# Altium PCB blinds.PcbDoc
Units mil, origin at the board's own origin, x right, y up, seen from the top; angles counter-clockwise.
Board outline 945 x 945 mil, 2 copper layers (Top Layer, Bottom Layer); 16 components, 11 nets, 36 pads, 6 vias.
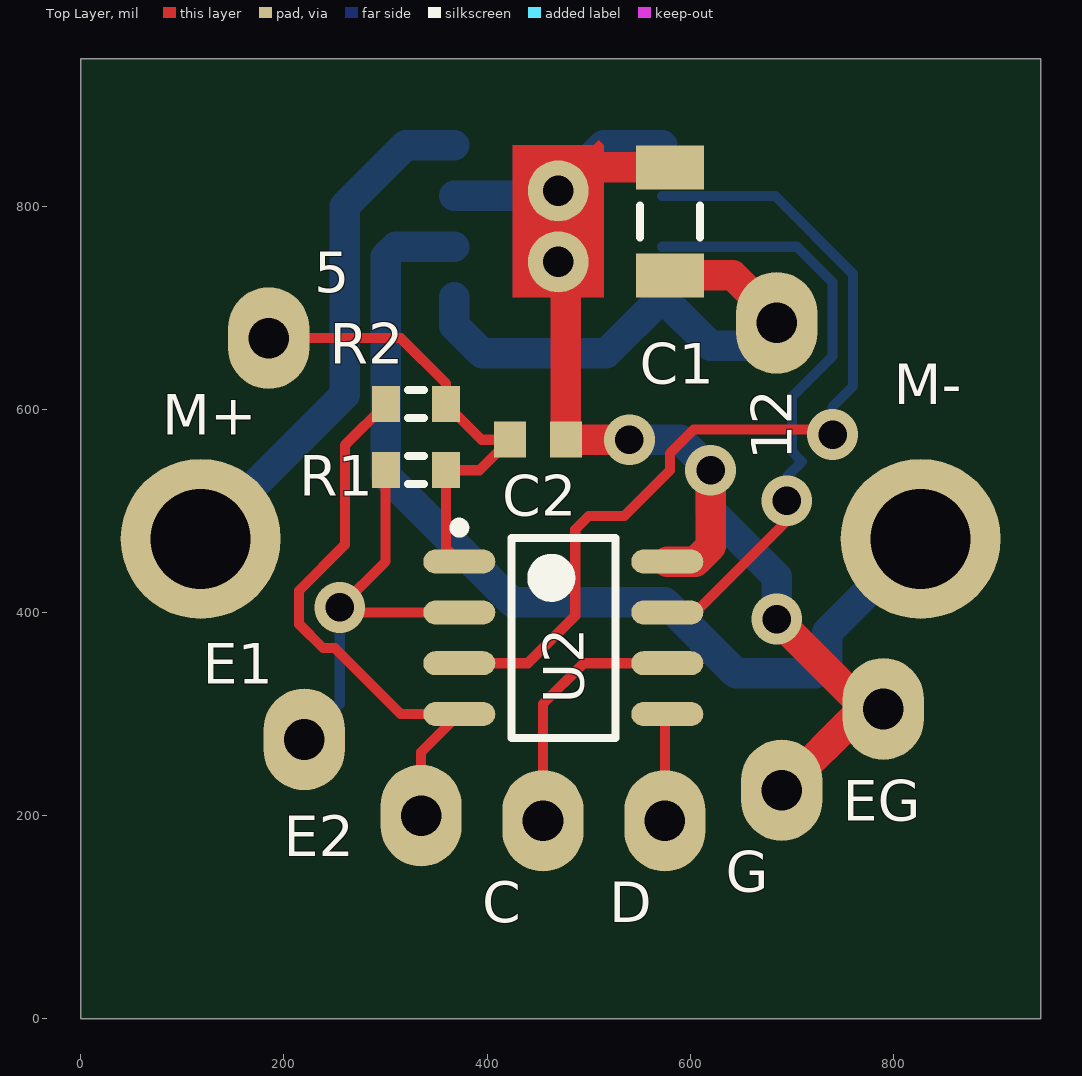
[diagram p0: Top Layer view]
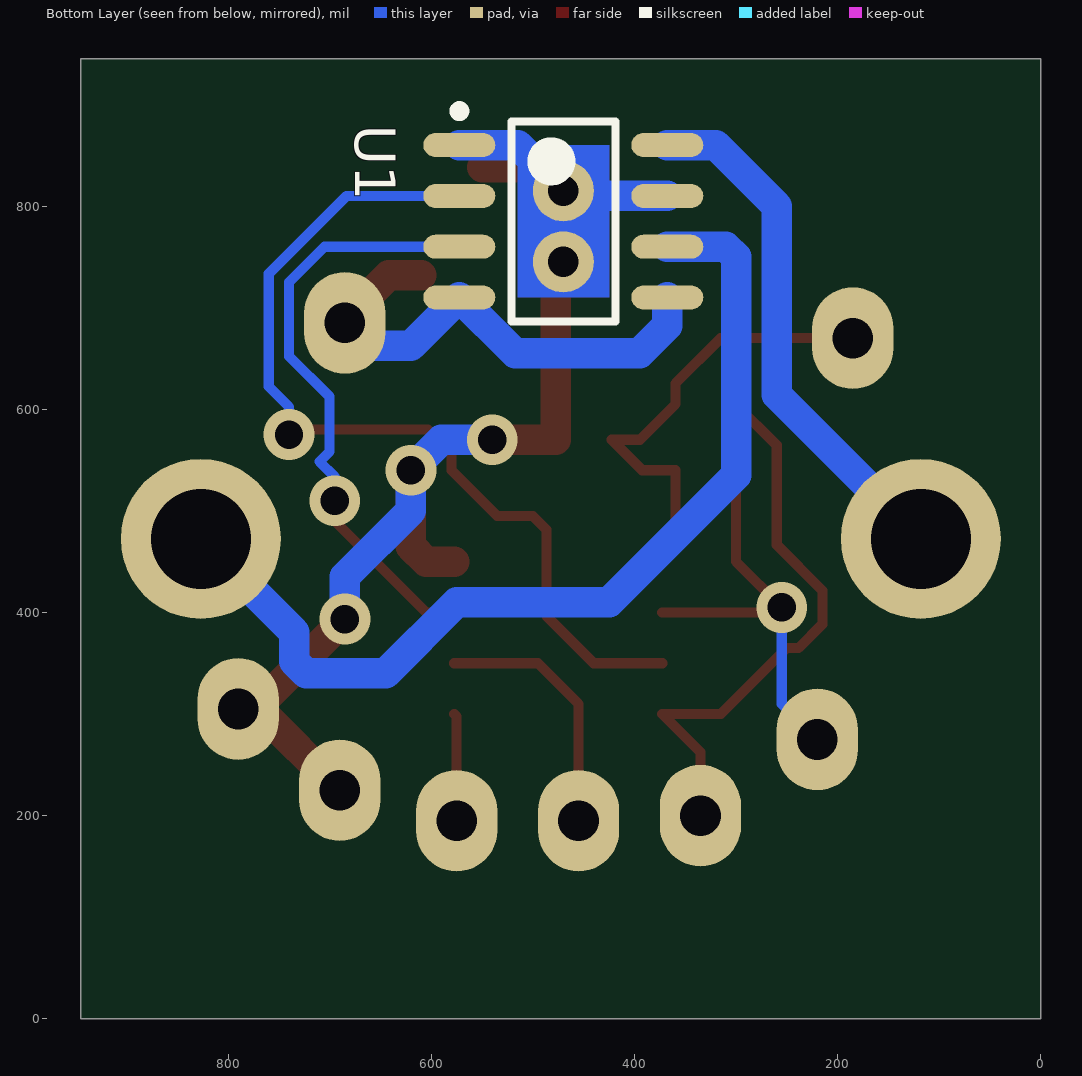
[diagram p1: Bottom Layer view, seen from below]

## Layer stack, top to bottom
Top Solder: solder mask 0.4, Solder Resist, Dk 3.5
Top Layer: signal copper 1.4
Dielectric 1: dielectric 12.6, FR-4, Dk 4.8
Bottom Layer: signal copper 1.4
Bottom Solder: solder mask 0.4, Solder Resist, Dk 3.5

## Board outline
0,0 0,945 945,945 945,0

## Design rules (kind name [scope] priority, off if disabled: settings)
Clearance [All] p1: gap=10
HoleSize [All] p1: absolutevalues=TRUE maxlimit=100 minlimit=20 maxpercent=80.000 minpercent=20.000
PolygonConnect [All] p1: connectstyle=Relief reliefconductorwidth=10 reliefentries=4 polygonreliefangle="90 Angle" airgapwidth=10
RoutingVias [All] p1: holewidth=28 width=50 viastyle="Through Hole" minholewidth=28 minwidth=50 maxholewidth=28 maxwidth=50
SMDNeckDown [InNetClass('HC')] p1: percent=200.000
SMDNeckDown SMDNeckDown_1 [All] p2: percent=150.000
SilkToSolderMaskClearance [IsPad And Not HasFootprint('J1-0603')] p1: minsilkscreentomaskgap=10 clearancetoexposedcopper=TRUE
SolderMaskExpansion [All] p1: expansion=4
Width Width_1 [InNetClass('HC')] p1: maxlimit=30 minlimit=30 preferedwidth=30
Width [All] p2: maxlimit=10 minlimit=10 preferedwidth=10
28 further rules are at their usual default settings.

## Classes and differential pairs
net class HC: GND NetM+_1 NetM-_1 V12

## Components (designator, comment, footprint, x,y, rotation, side; value= is the part's Value field where it differs from the comment)
5 "Socket" PIN1L#1 185,670 r180 top
12 "Socket" PIN1L#1 685,685 r0 top
C "Socket" PIN1L#1 455,195 r180 top
C1 "Cap Semi" C1206 580,785 r270 top
C2 "Cap Semi" 1608[0603] 450,570 r180 top
D "Socket" PIN1L#1 575,195 r0 top
E1 "Socket" PIN1L#1 220,275 r180 top
E2 "Socket" PIN1L#1 335,200 r0 top
EG "Socket" PIN1L#1 790,305 r0 top
G "Socket" PIN1L#1 690,225 r180 top
M+ "Socket" PIN1L#2 -85,455 r0 top
M- "Socket" PIN1L#3 795,430 r0 top
R1 "5k" J1-0603 330,540 r0 top
R2 "5k" J1-0603 330,605 r0 top
U1 "A4953" SOIC150-8_N 470,785 r180 bottom
U2 "PIC12F1840" SOIC150-8_N 475,375 r0 top

## Footprints (in the part's own frame and the unit in brackets; to place one, negate y for a bottom-side part, rotate by r counter-clockwise, add the part's x,y. Pads: shape width x height; smd on the part's side, far side on the other; paste and mask are expansions set on the pad)
1608[0603] [mm] "Chip Capacitor, Body 1.6x0.8mm, IPC High Density"
  rect 0.8x0.9 smd: 1(-0.7,0) 2(0.7,0)
  body extent -0.87,-0.48 0.87,0.48, height 1.3
C1206 [mm] "Chip Capacitor, Body 3.2x1.6mm, IPC High Density"
  rect 1.1x1.7 smd: 1(-1.35,0) 2(1.35,0)
  silkscreen extent -0.4,-0.75 0.4,0.75, body extent -1.7,-0.9 1.7,0.9, height 1.3
J1-0603 [mm] "Chip Resistor, Body 1.6x0.8mm, IPC High Density"
  rect 0.7x0.9 smd: 1(-0.75,0) 2(0.75,0)
  silkscreen extent -0.2,-0.35 0.2,0.35, body extent -0.85,-0.48 0.85,0.48, height 0.9
PIN1L#1 [mil] "Connector; Plug"
  oval 80x100 hole 40: 1(0,0)
PIN1L#2 [mil] "Connector; Plug"
  round 157.48 hole 98.43: 1(203.11,17.44)
PIN1L#3 [mil] "Connector; Plug"
  round 157.48 hole 98.43: 1(31.77,42.44)
SOIC150-8_N [mm]
  oval 1.8x0.6 smd: 1(-2.6,1.905) 2(-2.6,0.635) 3(-2.6,-0.635) 4(-2.6,-1.905) 5(2.6,-1.905) 6(2.6,-0.635) 7(2.6,0.635) 8(2.6,1.905)
  silkscreen extent -2.73,-2.5 1.3,2.88, body extent -2,-2.5 2,2.5, height 1.76

## Part data
C1 C2: "Capacitor (Semiconductor SIM Model)"
R1 R2: library part Res3, "Resistor"

## Free pads (board coordinates)
  round 60 hole 30 paste+0 mask+0: 2(470,815)
  round 60 hole 30 mask+0: 3(470,745)

## Via types
v1: diameter 50, hole 28, Top Layer to Bottom Layer, 6 vias

## Nets (pads, with @x,y where several pads share a name; then routed paths per layer and width w, separated by ;. In a path a pad name is that pad's centre, name@x,y a point inside that pad or via, vN(x,y) a via of type N, cw(c..) or ccw(c..) an arc to the next point about the centre after c; other vN are vias at no path point)
GND: C1.1 C2.1 EG.1 G.1 pad.2 pad.3 U1.1 U1.7 U2.8 | length 1356.7
  Top Layer w30: pad.3 477.56,737.44 C2.1 v1(540,570) ; pad.2 493.15,838.15 C1.1@550,838.15 ; U2.8 605,450 620,465 v1(620,540) ; v1(685,393.43) 771.72,306.72 G.1 770,305 EG.1
  Bottom Layer w30: U1.7 465,810 pad.2 515,860 U1.1 ; v1(540,570) 590,570 v1(620,540) ; v1(685,393.43) 685,435 620,500 ; 620,500 v1(620,540) ; 620,500 v1(620,540)
NetC_1: C.1 U2.6 | length 253.9
  Top Layer w10: C.1 455,310 495,350 U2.6
NetD_1: D.1 U2.5 | length 106
  Top Layer w10: D.1 575,297.64 U2.5
NetE1_1: E1.1 R1.1 U2.2 | length 423.1
  Top Layer w10: v1@255,400 U2.2 ; v1@262.16,405 v1(255,405) 300,450 300,539.53 R1.1
  Bottom Layer w10: E1.1 255,310 v1(255,405)
NetE2_1: E2.1 R2.1 U2.4 | length 561.8
  Top Layer w10: R2.1 260,564.53 260,466.57 215,421.57 215,388.43 238.43,365 250,365 315,300 U2.4 335,262.36 E2.1
NetM+_1: M+.1 U1.8 | length 518.8
  Bottom Layer w30: M+.1 260,614.33 260,800 320,860 U1.8
NetM-_1: M-.1 U1.6 | length 966
  Bottom Layer w30: U1.6 310,760 300,750 300,535 425,410 575,410 645,340 723.08,340 735,351.92 735,380.67 M-.1
NetU1_2: U1.2 U2.3 | length 910.2
  Top Layer w10: U2.3 440,350 486.69,396.69 486.69,481.69 500,495 535,495 580,540 580,556.57 603.43,580 735,580 v1(740,575)
  Bottom Layer w10: U1.2 683.28,810 760,733.28 760,622.36 740,602.36 v1(740,575)
NetU1_3: U1.3 U2.7 | length 599
  Top Layer w10: U2.7 605,400 695,490 v1(695,510)
  Bottom Layer w10: U1.3 705,760 740,725 740,652.22 700,612.22 700,558.43 710,548.43 695,533.43 v1(695,510)
V5: 5.1 C2.2 R1.2 R2.2 U2.1 | length 461.6
  Top Layer w10: 5.1 315,670 359.53,625.47 R2.2 394.53,570 C2.2 392.44,540 R1.2 359.53,463.11 U2.1
V12: 12.1 C1.2 U1.4 U1.5 | length 517.6
  Top Layer w30: C1.2@610,731.85 641.85,731.85 688.7,685 12.1@700,685
  Bottom Layer w30: U1.5 367.64,682.36 395,655 517.36,655 U1.4 620,662.36 662.36,662.36 12.1

## Other copper
Top Layer:
  region net GND: 425,710 425,860 505,860 510,865 515,860 515,710
Bottom Layer:
  region net GND: 425,710 425,860 505,860 510,865 515,860 515,710